# Altium PCB ISL6236_DEMO_PCB.PcbDoc
Units mm, origin at the board's own origin, x right, y up, seen from the top; angles counter-clockwise.
Board outline 50 x 50 mm, 6 copper layers (L1, L2, L3, L4, L5, L6), stack 0.816 mm thick; 41 components, 27 nets, 119 pads, 96 vias.
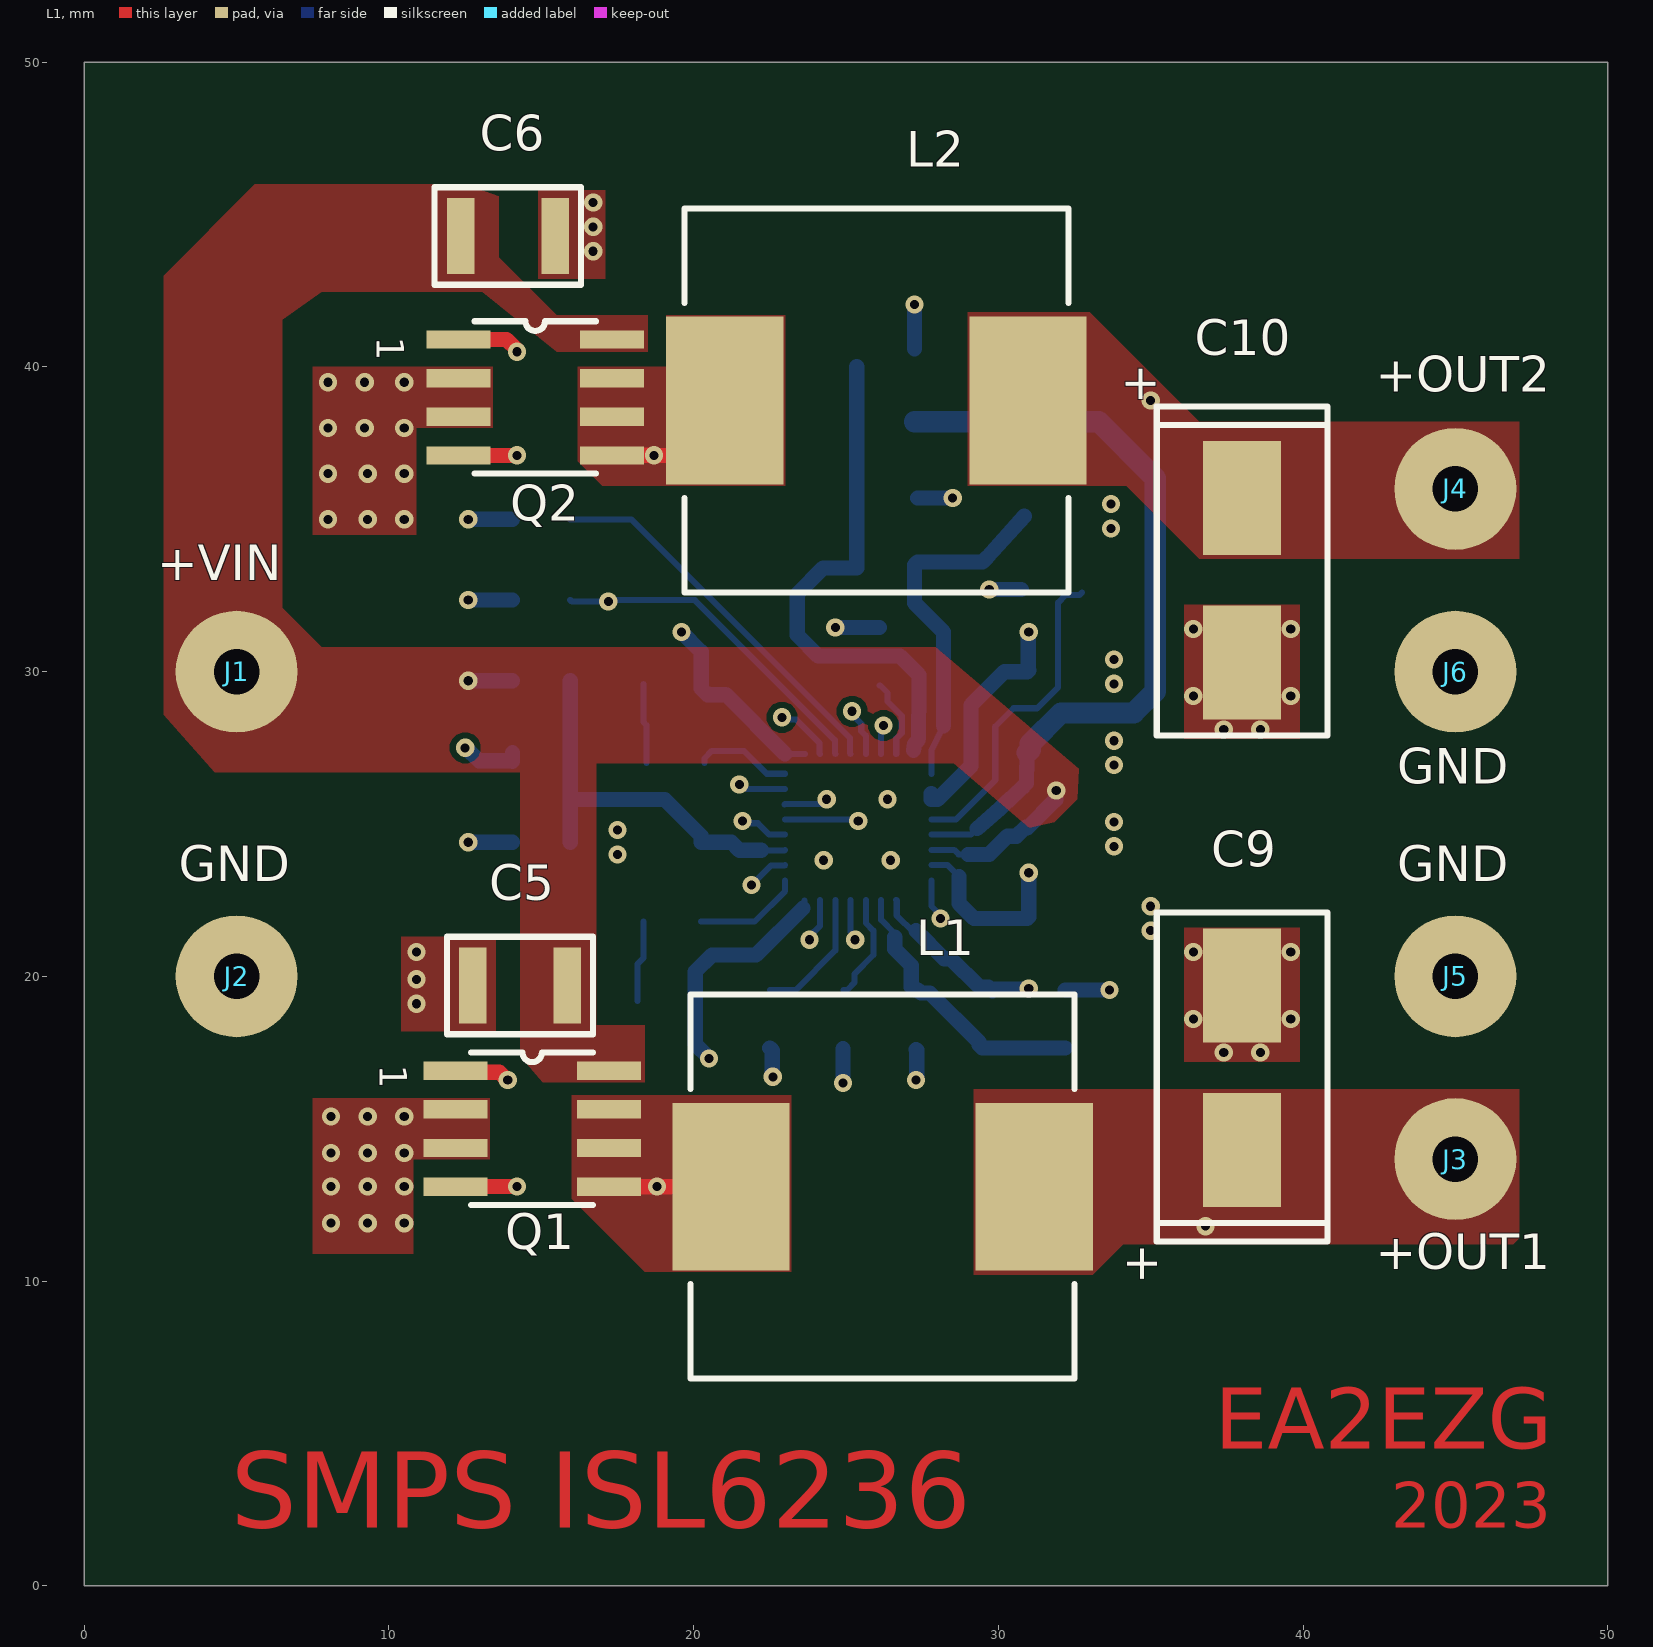
[diagram p0: L1 view]
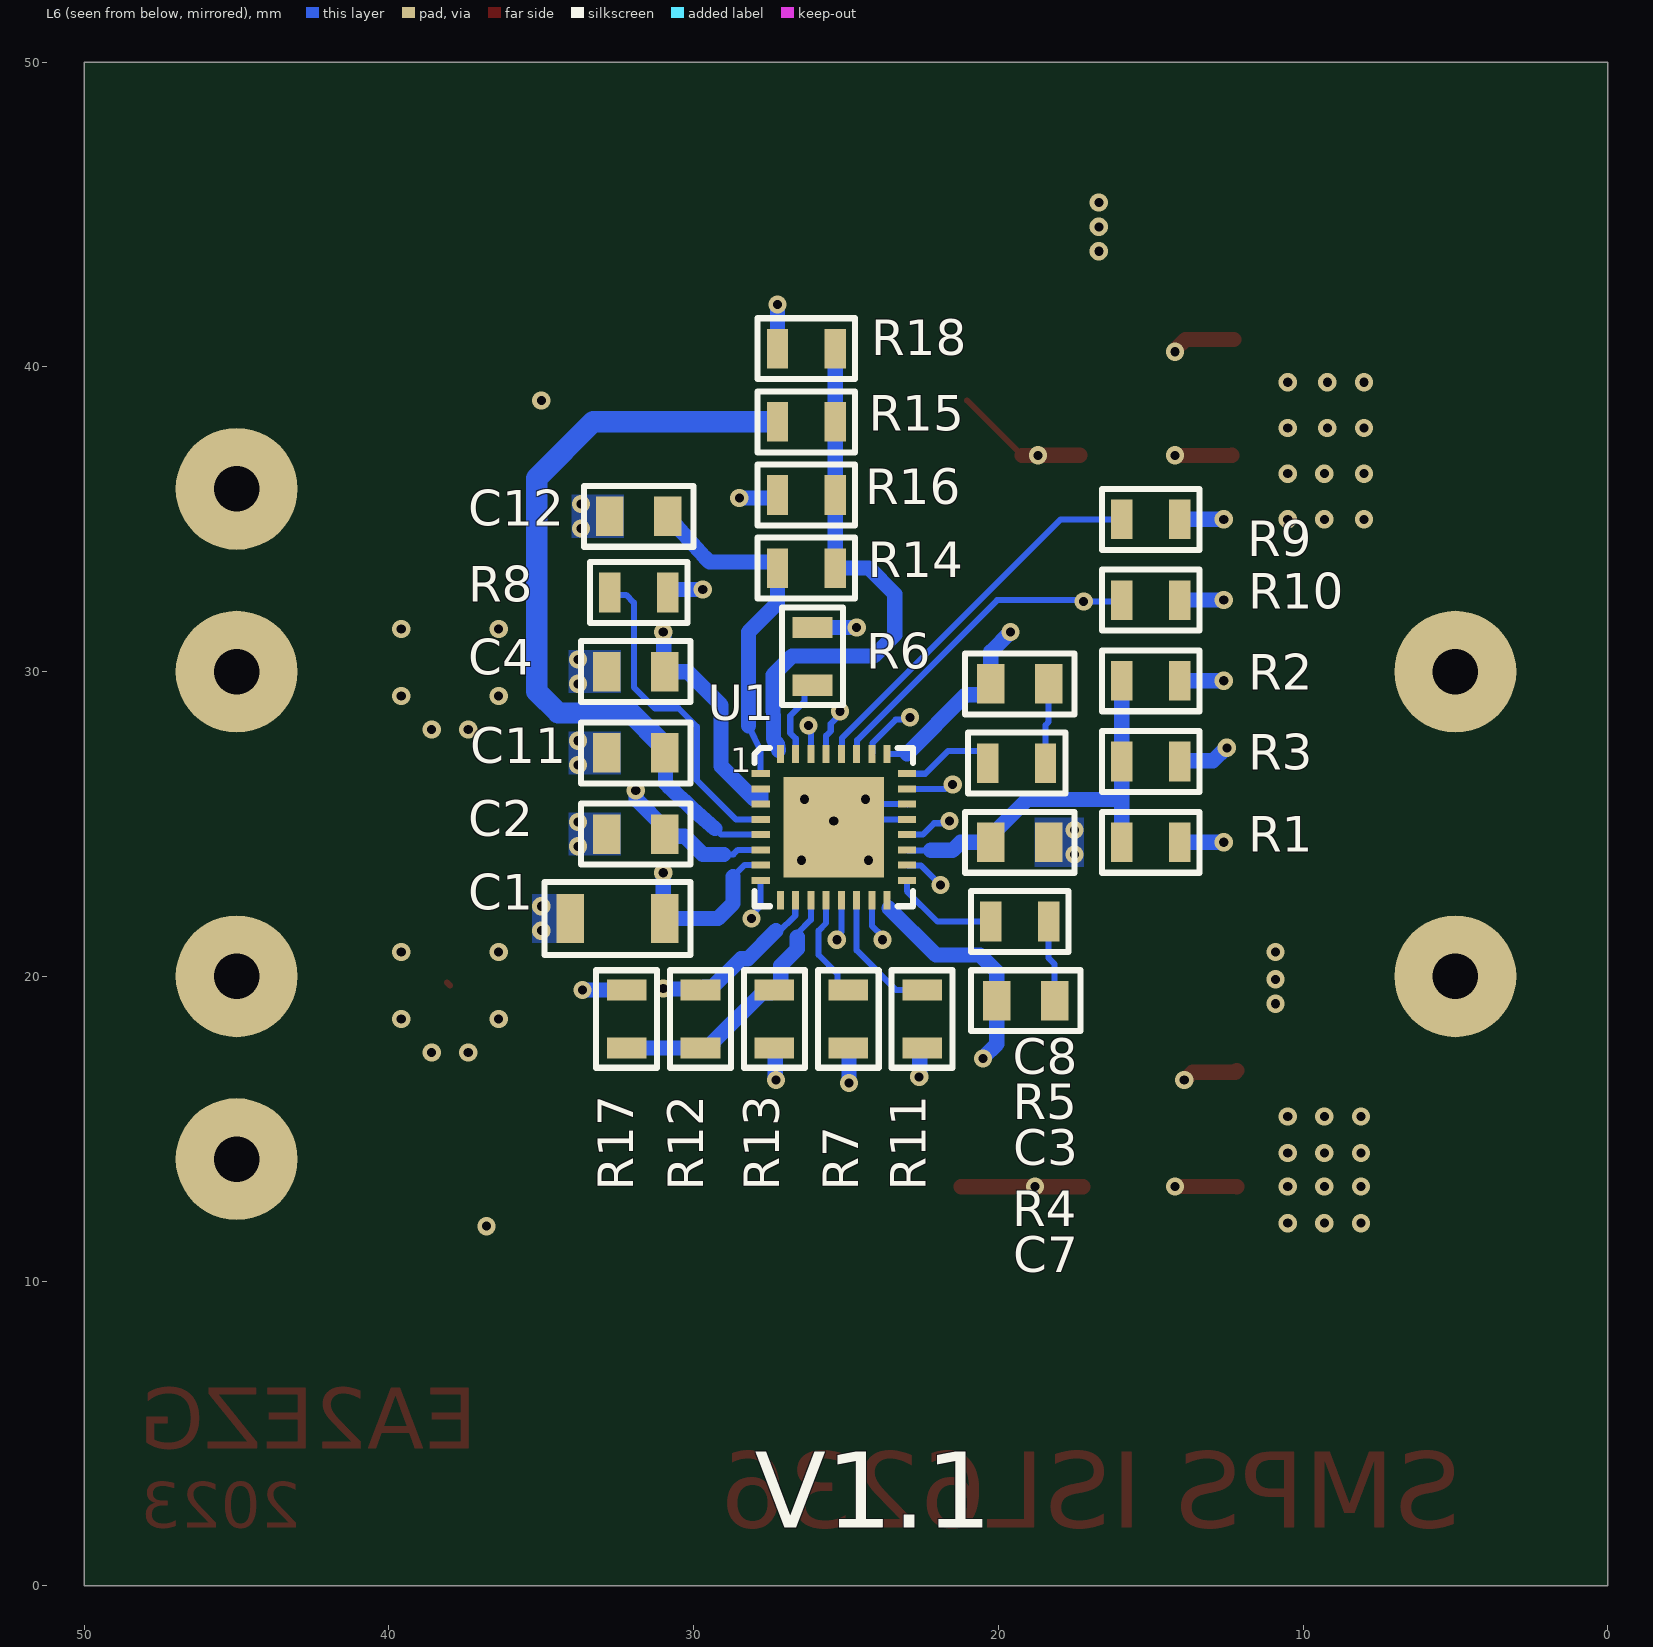
[diagram p1: L6 view, seen from below]
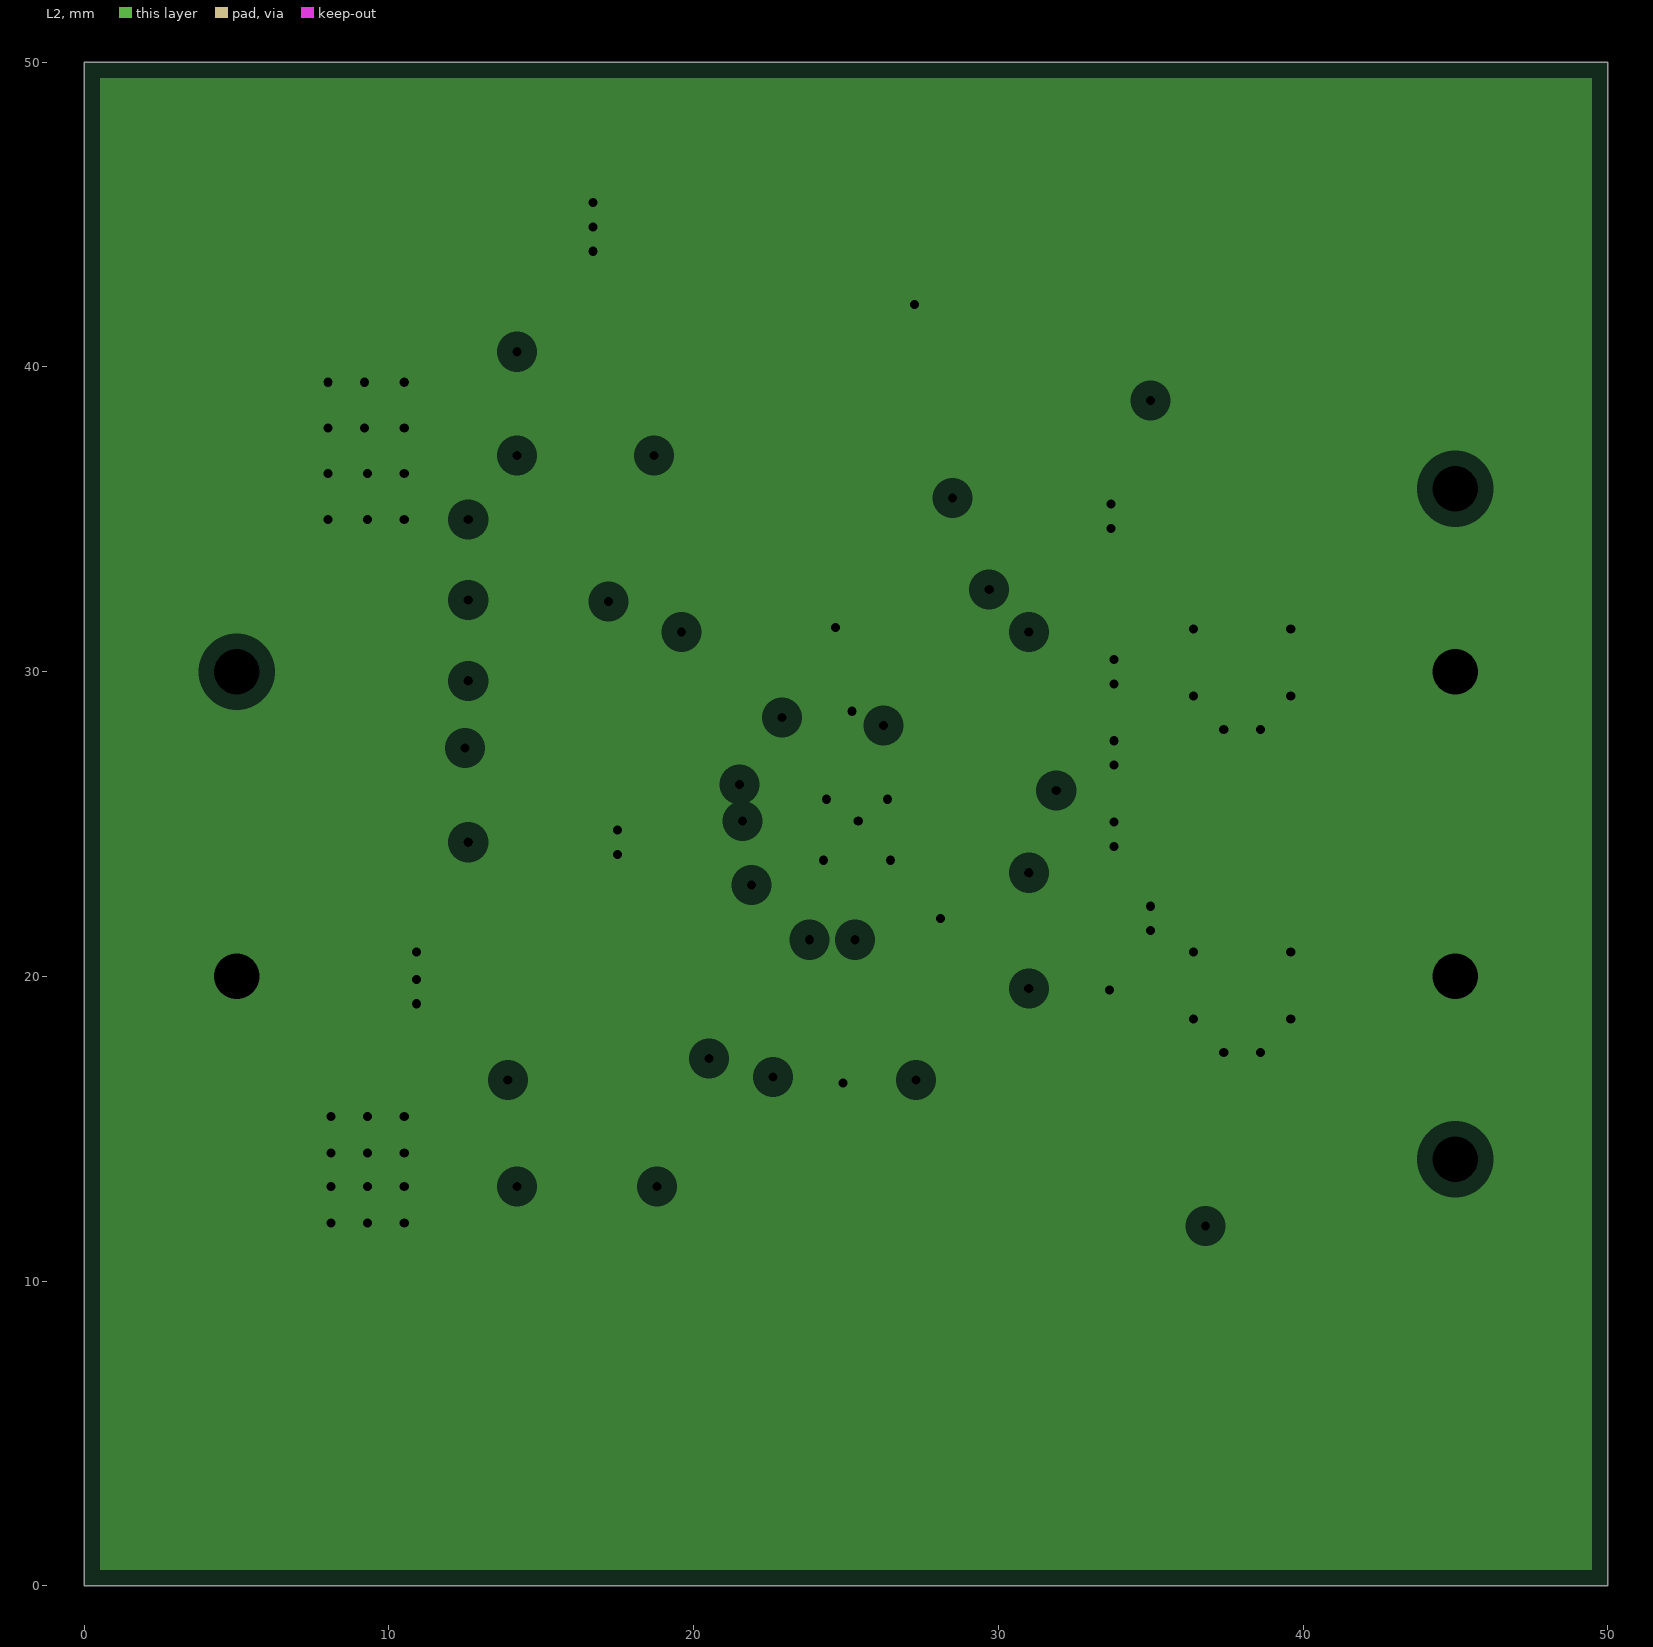
[diagram p2: L2, clearances drawn from the general rule]
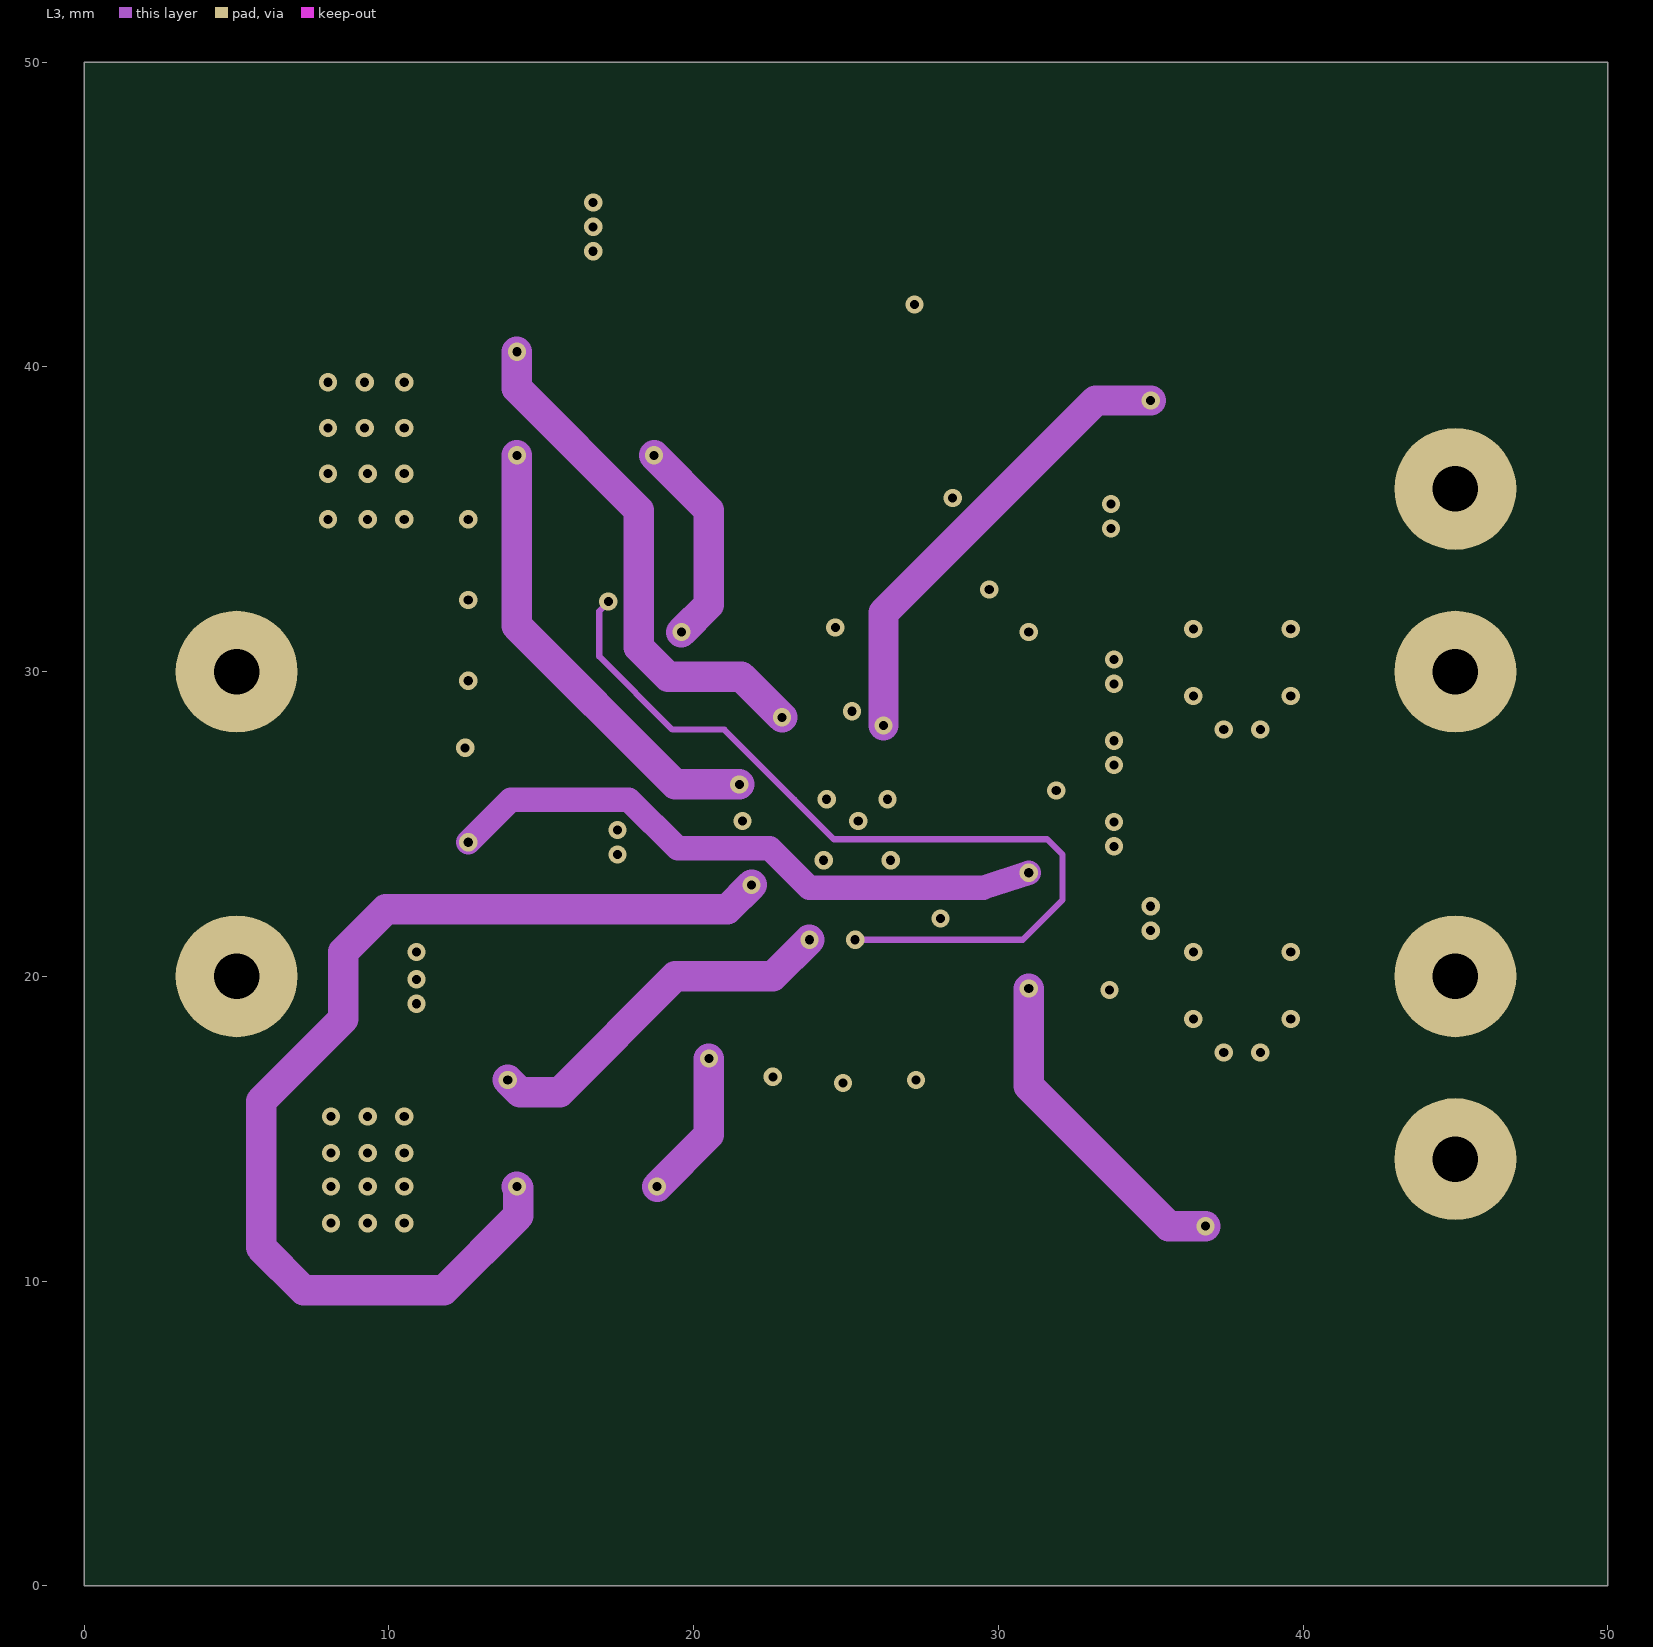
[diagram p3: L3]
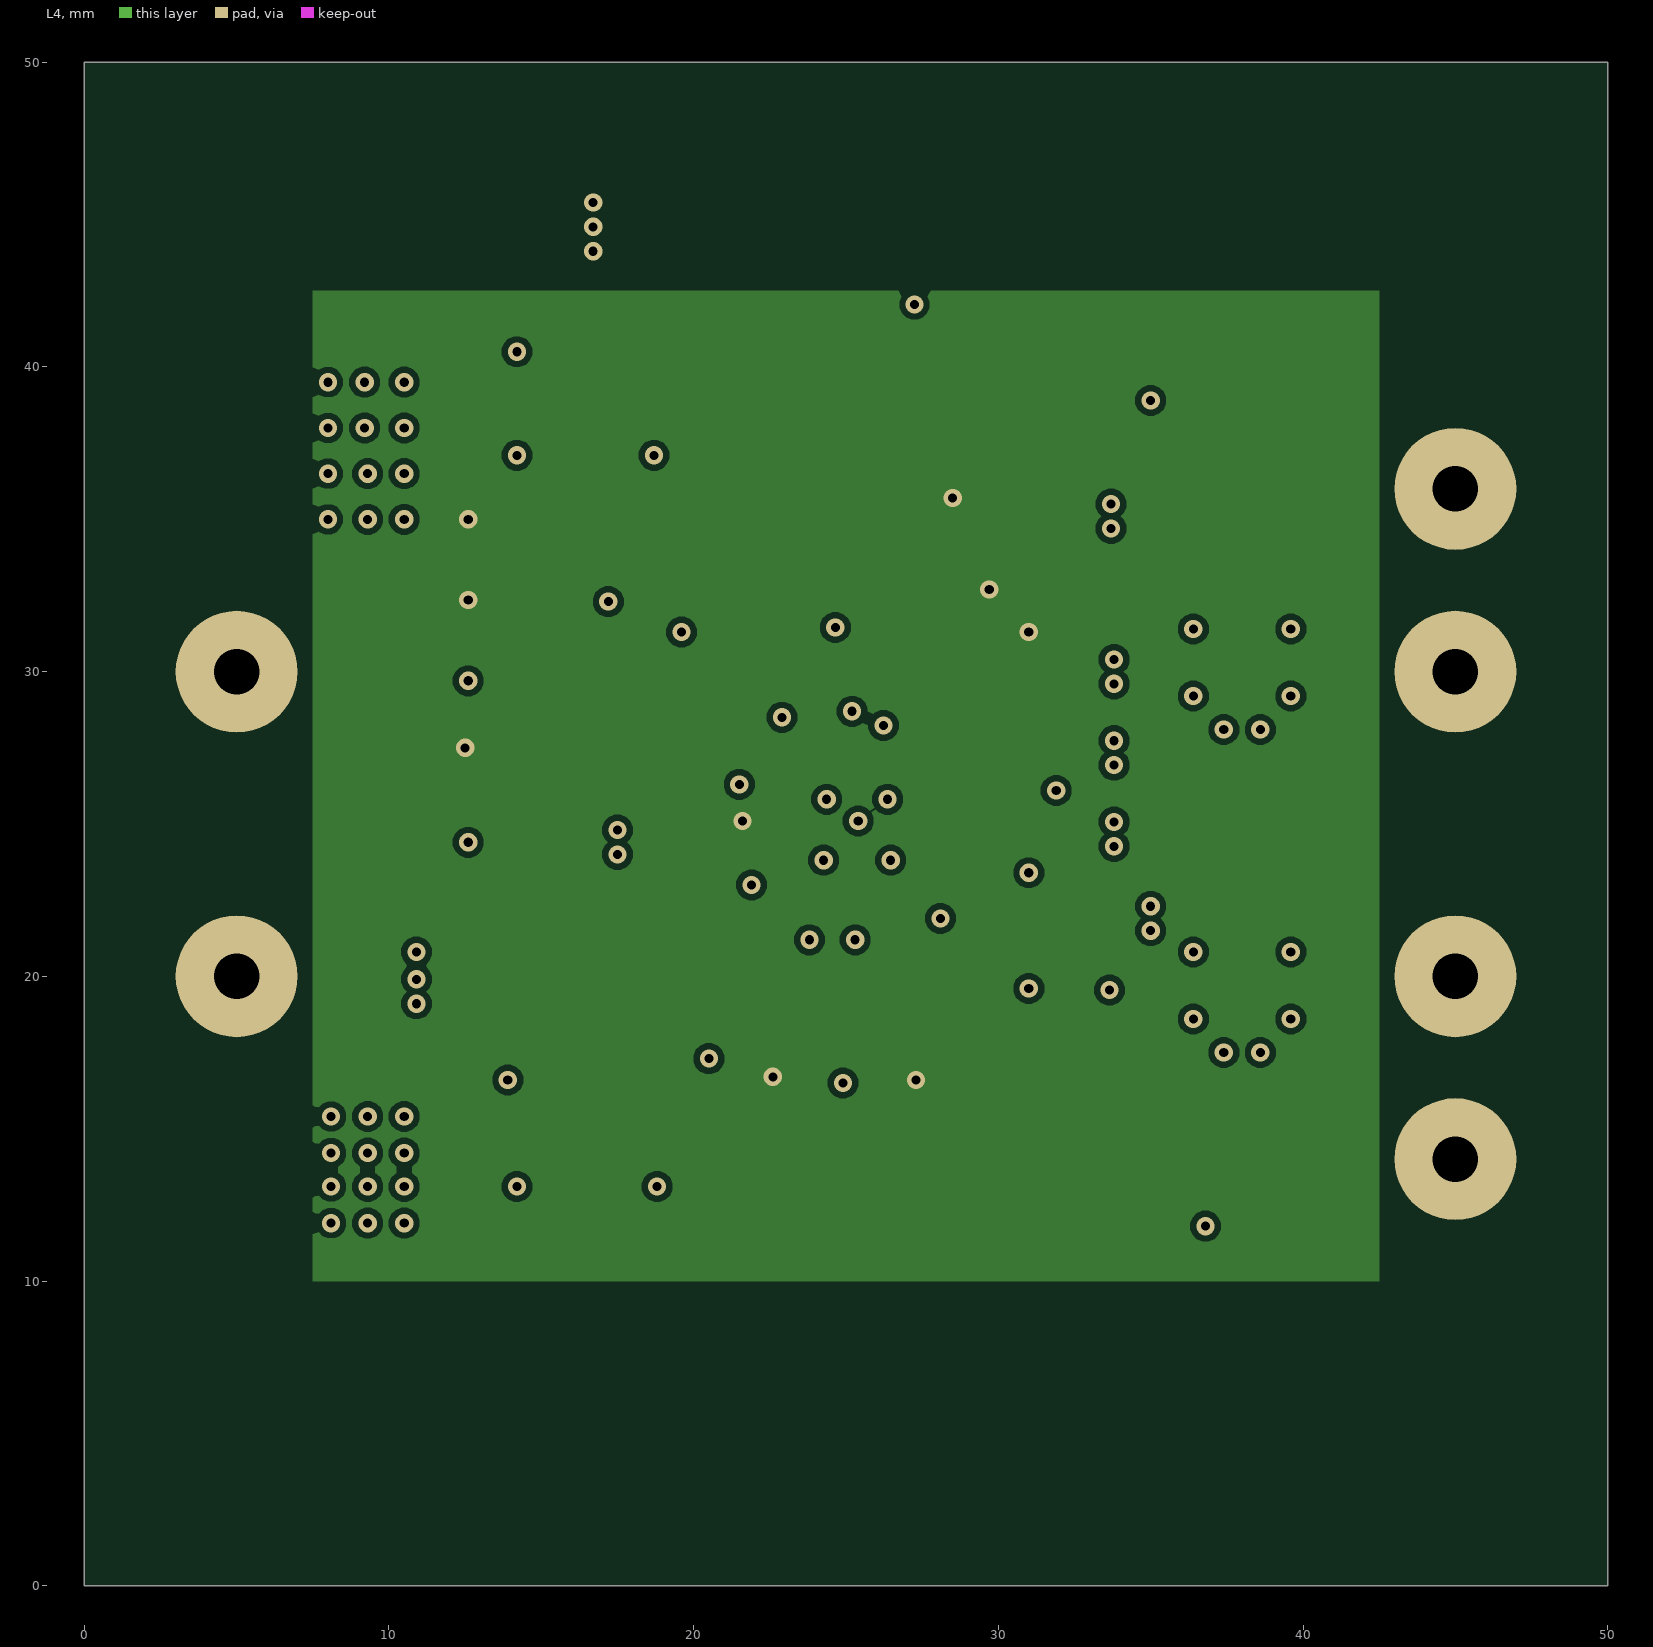
[diagram p4: L4]
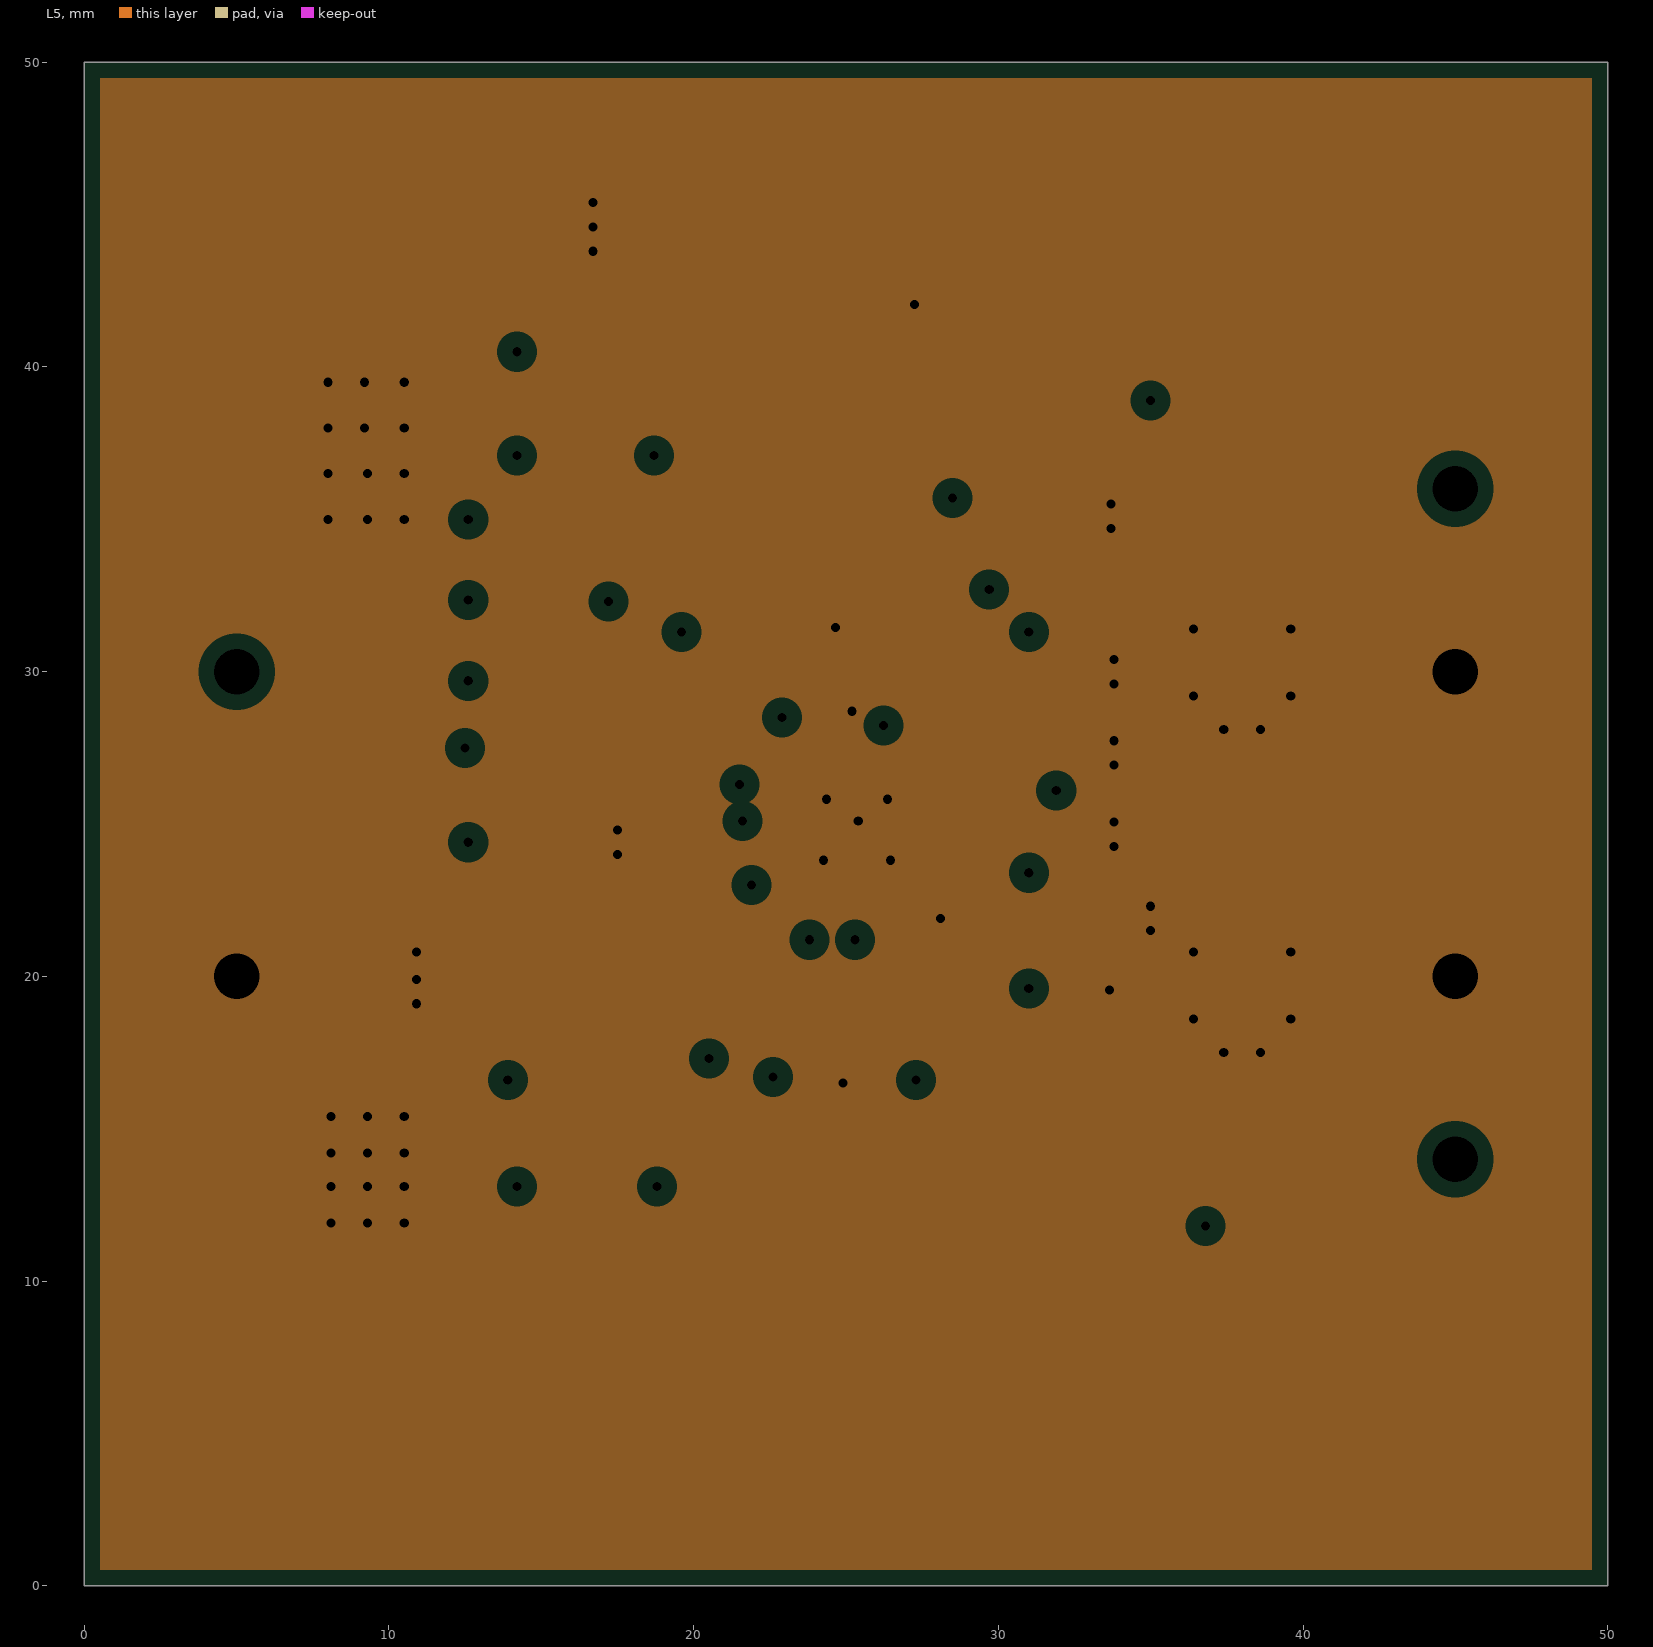
[diagram p5: L5, clearances drawn from the general rule]

## Layer stack, top to bottom
Top Solder: solder mask 0.0102, Solder Resist, Dk 3.5
L1: signal copper 0.0356
Dielectric 2: prepreg 0.0711, PP-006, Dk 4.1
L2: plane copper 0.035, net GND
Dielectric 3: prepreg 0.0711, PP-006, Dk 4.1
L3: signal copper 0.035
Dielectric 4: prepreg 0.0711, PP-006, Dk 4.1
L4: signal copper 0.035
Dielectric 5: prepreg 0.0711, PP-006, Dk 4.1
L5: plane copper 0.035, net GND
Dielectric 1: dielectric 0.32, FR-4, Dk 4.8
L6: signal copper 0.0356
Bottom Solder: solder mask 0.0102, Solder Resist, Dk 3.5

## Board outline
0,0 50,0 50,50 0,50

## Design rules (kind name [scope] priority, off if disabled: settings)
Clearance [All] p1: gap=0.2 ignorepadtopadclearanceinfootprint=FALSE
ComponentClearance [All] p1: gap=0.1 collisioncheckmode=3 verticalgap=0.1 showdistances=FALSE
HoleSize [IsVia] p1: absolutevalues=TRUE maxlimit=0.3 minlimit=0.3 maxpercent=80.000 minpercent=20.000
MinimumSolderMaskSliver [All] p1: minsoldermaskwidth=0.1
PlaneClearance [All] p1: clearance=0.508
PlaneConnect [All] p1: pad.planeconnectstyle=Relief pad.reliefexpansion=0.508 pad.reliefentries=4 pad.reliefconductorwidth=1 pad.reliefairgap=0.5 via.planeconnectstyle=Direct via.reliefexpansion=0.508 via.reliefentries=4 via.reliefconductorwidth=0.254 via.reliefairgap=0.254
PolygonConnect [All] p1: connectstyle=Direct reliefconductorwidth=0.254 reliefentries=4 polygonreliefangle="90 Angle" airgapwidth=0.254
RoutingVias [All] p1: holewidth=0.3 width=0.6 viastyle="Through Hole" minholewidth=0.3 minwidth=0.6 maxholewidth=0.3 maxwidth=0.6
SilkToSilkClearance [All] p1: silktosilkclearance=0.2
SilkToSolderMaskClearance [IsPad] p1: minsilkscreentomaskgap=0.1 clearancetoexposedcopper=TRUE
SolderMaskExpansion [All] p1: expansion=0.102 istentingtop=FALSE
Width [All] p1: maxlimit=10 minlimit=0.2 preferedwidth=0.2
23 further rules are at their usual default settings.

## Components (designator, comment, footprint, x,y, rotation, side; value= is the part's Value field where it differs from the comment)
C1 "4u7, 50V" C1206 32.5,21.9 r180 bottom
C2 "1uF_50V" C0805 31.9,24.667 r180 bottom
C3 "1uF_50V" C0805 19.3,24.4 r0 bottom
C4 "1uF_50V" C0805 31.9,30 r180 bottom
C5 "10uF" C1210 14.3,19.7 r0 top
C6 "10uF" C1210 13.9,44.3 r180 top
C7 "100nF" C0805 19.1,19.2 r180 bottom
C8 "220nF" C0805 19.3,29.6 r0 bottom
C9 "330uF 10V" 7343-43 38,17 r90 top
C10 "330uF 10V" 7343-43 38,33 r270 top
C11 "10nF" C0805 31.9,27.333 r180 bottom
C12 "100nF" C0805 31.8,35.1 r0 bottom
J1 "4mmx1mm5" PAD_WITH_HOLE_4MMX1MM5 5,30 r90 top
J2 "4mmx1mm5" PAD_WITH_HOLE_4MMX1MM5 5,20 r90 top
J3 "4mmx1mm5" PAD_WITH_HOLE_4MMX1MM5 45,14 r0 top
J4 "4mmx1mm5" PAD_WITH_HOLE_4MMX1MM5 45,36 r0 top
J5 "4mmx1mm5" PAD_WITH_HOLE_4MMX1MM5 45,20 r0 top
J6 "4mmx1mm5" PAD_WITH_HOLE_4MMX1MM5 45,30 r0 top
L1 "3u3.DR125-3R3-R" DR125 26.2,13.1 r180 top
L2 "2u2. DR125-2R2-R" DR125 26,38.9 r0 top
Q1 "SI4816BDY-T1-E3" SO-8 14.7,15 r0 top
Q2 "SI4816BDY-T1-E3" SO-8 14.8,39 r0 top
R1 "0R" R0805 15,24.4 r180 bottom
R2 "0R" R0805 15,29.7 r0 bottom
R3 "10R" R0805 15,27.05 r180 bottom
R4 "1R" R0805 19.3,21.8 r0 bottom
R5 "1R" R0805 19.4,27 r180 bottom
R6 "200K" R0805 26.1,30.5 r90 bottom
R7 "200K" R0805 24.925,18.6 r90 bottom
R8 "10K" R0805 31.8,32.6 r180 bottom
R9 "200K" R0805 15,35 r180 bottom
R10 "200K" R0805 15,32.35 r180 bottom
R11 "10K" R0805 22.5,18.6 r270 bottom
R12 "DNF" R0805 29.775,18.6 r90 bottom
R13 "0R" R0805 27.35,18.6 r270 bottom
R14 "DNF" R0805 26.3,33.4 r0 bottom
R15 "0R" R0805 26.3,38.2 r0 bottom
R16 "DNF" R0805 26.3,35.8 r0 bottom
R17 "DNF" R0805 32.2,18.6 r270 bottom
R18 "DNF" R0805 26.3,40.6 r180 bottom
U1 "ISL6236AIRZ" L32.5X5B 25.4,24.9 r180 bottom

## Footprints (in the part's own frame and the unit in brackets; to place one, negate y for a bottom-side part, rotate by r counter-clockwise, add the part's x,y. Pads: shape width x height; smd on the part's side, far side on the other; paste and mask are expansions set on the pad)
7343-43 [mm]
  rect 3.75x2.55 smd: 1(-2.7,0) 2(2.7,0)
  silkscreen extent -5.7,-2.8 5.1,2.8
C0805 [mm]
  rect 0.9x1.3 smd: 1(-0.95,0) 2(0.95,0)
  silkscreen extent -1.8,-1 1.8,1
C1206 [mm]
  rect 0.9x1.6 smd: 1(-1.55,0) 2(1.55,0)
  silkscreen extent -2.4,-1.2 2.4,1.2
C1210 [mm]
  rect 0.9x2.5 smd: 1(-1.55,0) 2(1.55,0)
  silkscreen extent -2.4,-1.6 2.4,1.6
DR125 [mm]
  rect 3.85x5.5 smd: 1(-4.975,0) 2(4.975,0)
  silkscreen extent -6.3,-6.3 6.3,6.3
L32.5X5B [mm]
  rect 0.6x0.23 smd mask+0.051: 1(-2.4,1.75) 2(-2.4,1.25) 3(-2.4,0.75) 4(-2.4,0.25) 5(-2.4,-0.25) 6(-2.4,-0.75) 7(-2.4,-1.25) 8(-2.4,-1.75) 17(2.4,-1.75) 18(2.4,-1.25) 19(2.4,-0.75) 20(2.4,-0.25) 21(2.4,0.25) 22(2.4,0.75) 23(2.4,1.25) 24(2.4,1.75)
  rect 0.23x0.6 smd mask+0.051: 9(-1.75,-2.4) 10(-1.25,-2.4) 11(-0.75,-2.4) 12(-0.25,-2.4) 13(0.25,-2.4) 14(0.75,-2.4) 15(1.25,-2.4) 16(1.75,-2.4) 25(1.75,2.4) 26(1.25,2.4) 27(0.75,2.4) 28(0.25,2.4) 29(-0.25,2.4) 30(-0.75,2.4) 31(-1.25,2.4) 32(-1.75,2.4)
  rect 3.3x3.3 smd mask+0.051: 33(0,0)
  silkscreen extent -2.6,-2.6 2.6,2.6
PAD_WITH_HOLE_4MMX1MM5 [mm]
  round 4 hole 1.5: 1(0,0)
R0805 [mm]
  rect 0.7x1.3 smd: 1(-0.95,0) 2(0.95,0)
  silkscreen extent -1.6,-1 1.6,1
SO-8 [mm]
  rect 2.1x0.6 smd: 1(-2.525,1.905) 2(-2.525,0.635) 3(-2.525,-0.635) 4(-2.525,-1.905) 5(2.525,-1.905) 6(2.525,-0.635) 7(2.525,0.635) 8(2.525,1.905)
  silkscreen extent -2,-2.5 2,2.5

## Part data
C1: library part C3216X5R1H475K160AB, "C Series 1206 4.7 uF 50 V ±10 % Tolerance X5R SMT Multilayer Ceramic Capacitor", Manufacturer=TDK, Supplier Part Number 1=445-5994-1-ND, Category="Ceramic Capacitors", ComponentLink1Description=https://datasheet.ciiva.com/24216/c3216x5r1h475k160ab-265269-24216325.pdf?src-supplier=Mouser, ComponentLink1URL=https://datasheet.ciiva.com/24216/c3216x5r1h475k160ab-265269-24216325.pdf?src-supplier=Mouser, ComponentLink2Description=https://datasheet.ciiva.com/6286/tdkmlcccaprange-6286230.pdf?src-supplier=Digi-Key, ComponentLink2URL=https://datasheet.ciiva.com/6286/tdkmlcccaprange-6286230.pdf?src-supplier=Digi-Key, ComponentLink3Description=https://datasheet.ciiva.com/6286/tdkmlcccaprange-6286233.pdf?src-supplier=Digi-Key, ComponentLink3URL=https://datasheet.ciiva.com/6286/tdkmlcccaprange-6286233.pdf?src-supplier=Digi-Key, ComponentLink4Description=https://datasheet.ciiva.com/6286/tdkmlcccaprange-6286236.pdf?src-supplier=Digi-Key, ComponentLink4URL=https://datasheet.ciiva.com/6286/tdkmlcccaprange-6286236.pdf?src-supplier=Digi-Key, Manufacturer Part Number=C3216X5R1H475K160AB, Pricing 1="1=0,72, 10=0,53, 50=0,4242, 100=0,3636, 500=0,28784, 1000=0,2424 (USD)", RoHS=Yes, Stock 1=67002, Supplier 1=Digi-Key
C2 C3 C4: library part C2012X7R1H105K125AB, "C Series 0805 1 uF 50 V ±10% Tolerance X7R SMT Multilayer Ceramic Capacitor", Manufacturer=TDK, Supplier Part Number 1=445-7547-1-ND, Category="Ceramic Capacitors", ComponentLink1Description=https://datasheet.ciiva.com/6274/tdkmlcccaprange-6274886.pdf?src-supplier=Digi-Key, ComponentLink1URL=https://datasheet.ciiva.com/6274/tdkmlcccaprange-6274886.pdf?src-supplier=Digi-Key, ComponentLink2Description=https://datasheet.ciiva.com/6274/tdkmlcccaprange-6274888.pdf?src-supplier=Digi-Key, ComponentLink2URL=https://datasheet.ciiva.com/6274/tdkmlcccaprange-6274888.pdf?src-supplier=Digi-Key, ComponentLink3Description=https://datasheet.ciiva.com/6274/tdkmlcccaprange-6274890.pdf?src-supplier=Digi-Key, ComponentLink3URL=https://datasheet.ciiva.com/6274/tdkmlcccaprange-6274890.pdf?src-supplier=Digi-Key, ComponentLink4Description=https://datasheet.ciiva.com/24191/general-b11-24191449.pdf?src-supplier=Future+Electronics, ComponentLink4URL=https://datasheet.ciiva.com/24191/general-b11-24191449.pdf?src-supplier=Future+Electronics, ComponentLink5Description=https://datasheet.ciiva.com/28673/mlcc-commercial-general-en-28673565.pdf?src-supplier=Element14, ComponentLink5URL=https://datasheet.ciiva.com/28673/mlcc-commercial-general-en-28673565.pdf?src-supplier=Element14, ComponentLink6Description=https://datasheet.ciiva.com/22718/1796654-22718037.pdf?src-supplier=Element14, ComponentLink6URL=https://datasheet.ciiva.com/22718/1796654-22718037.pdf?src-supplier=Element14, ComponentLink7Description=https://datasheet.ciiva.com/23803/1796654-23803036.pdf?src-supplier=Newark, ComponentLink7URL=https://datasheet.ciiva.com/23803/1796654-23803036.pdf?src-supplier=Newark, Manufacturer Part Number=C2012X7R1H105K125AB, Pricing 1="1=0,28, 10=0,189, 50=0,126, 100=0,1071, 500=0,07562, 1000=0,06618 (USD)", RoHS=Yes, Stock 1=331733, Supplier 1=Digi-Key
C5 C6: library part C1210C106K5PACTU, "Multilayer Ceramic Capacitor, 10 uF, 50 V, ± 10%, X5R, 1210 [3225 Metric]", Manufacturer=KEMET, Supplier Part Number 1=399-C1210C106K5PAC7800CT-ND, Category="Ceramic Capacitors", ComponentLink1Description=https://datasheet.ciiva.com/29540/kem-c1006-x5r-smd-29540231.pdf?src-supplier=Digi-Key, ComponentLink1URL=https://datasheet.ciiva.com/29540/kem-c1006-x5r-smd-29540231.pdf?src-supplier=Digi-Key, ComponentLink2Description=https://datasheet.ciiva.com/29540/kem-c1006-x5r-smd-29540232.pdf?src-supplier=Digi-Key, ComponentLink2URL=https://datasheet.ciiva.com/29540/kem-c1006-x5r-smd-29540232.pdf?src-supplier=Digi-Key, ComponentLink3Description=https://datasheet.ciiva.com/29540/kem-c1006-x5r-smd-29540233.pdf?src-supplier=Digi-Key, ComponentLink3URL=https://datasheet.ciiva.com/29540/kem-c1006-x5r-smd-29540233.pdf?src-supplier=Digi-Key, Manufacturer Part Number=C1210C106K5PACTU, Pricing 1="1=0,95, 10=0,722, 50=0,6, 100=0,5166, 500=0,39996 (USD)", RoHS=Yes, Stock 1=93202, Supplier 1=Digi-Key
C7 C12: library part C0805C104K5REC7210, "Cap Cer 0805 0.1UF 50V X7R 10%", Manufacturer=KEMET, Supplier Part Number 1=399-C0805C104K5REC7210CT-ND, Category="Ceramic Capacitors", ComponentLink1Description=https://api.kemet.com/component-edge/download/datasheet/C0805C104K5REC7210.pdf?src-supplier=Digi-Key, ComponentLink1URL=https://api.kemet.com/component-edge/download/datasheet/C0805C104K5REC7210.pdf?src-supplier=Digi-Key, Manufacturer Part Number=C0805C104K5REC7210, Pricing 1="1=0,26, 10=0,176, 50=0,1054, 100=0,089, 500=0,06092, 1000=0,05389, 2500=0,05155, 5000=0,04686 (USD)", RoHS=Yes, RoHS Compliant=Yes, Stock 1=14120, Supplier 1=Digi-Key
C8: library part C0805F224K5RACTU, "Cap Ceramic 0.22uF 50V X7R 10% SMD 2.0 x 1.2 mm OMD-CAP 125 C Plastic T/R", Manufacturer=KEMET, Supplier Part Number 1=399-C0805F224K5RAC7800CT-ND, Category="Ceramic Capacitors", ComponentLink1Description=https://datasheet.ciiva.com/147/docfinderpartnumber-c0805f224k5ractu-147508.pdf?src-supplier=Digi-Key, ComponentLink1URL=https://datasheet.ciiva.com/147/docfinderpartnumber-c0805f224k5ractu-147508.pdf?src-supplier=Digi-Key, ComponentLink2Description=https://datasheet.ciiva.com/5969/kem-c1002-x7r-smd-5969831.pdf?src-supplier=Farnell, ComponentLink2URL=https://datasheet.ciiva.com/5969/kem-c1002-x7r-smd-5969831.pdf?src-supplier=Farnell, ComponentLink3Description=https://datasheet.ciiva.com/7842/kem-c1002-x7r-smd-7842633.pdf?src-supplier=Element14, ComponentLink3URL=https://datasheet.ciiva.com/7842/kem-c1002-x7r-smd-7842633.pdf?src-supplier=Element14, Manufacturer Part Number=C0805F224K5RACTU, Pricing 1="1=0,45, 10=0,319, 50=0,241, 100=0,21, 500=0,15554, 1000=0,13221 (USD)", RoHS=Yes, Stock 1=27532, Supplier 1=Digi-Key
C9 C10: library part T530X337M010ATE004, "Cap Tant Solid 330uF 10V X CASE 20% (7.3 X 4.3 X 4mm) SMD 7343-43 0.004 Ohm 125 C T/R", Manufacturer=KEMET, Supplier Part Number 1=399-10378-1-ND, Category="Polymer Capacitors", ComponentLink1Description=https://datasheet.ciiva.com/11794/0900766b80deaa91-11794477.pdf?src-supplier=Rs, ComponentLink1URL=https://datasheet.ciiva.com/11794/0900766b80deaa91-11794477.pdf?src-supplier=Rs, ComponentLink2Description=https://datasheet.ciiva.com/14593/70096008-14593753.pdf?src-supplier=Allied+Electronics, ComponentLink2URL=https://datasheet.ciiva.com/14593/70096008-14593753.pdf?src-supplier=Allied+Electronics, Manufacturer Part Number=T530X337M010ATE004, Pricing 1="1=7,14, 10=6,35, 50=5,5562, 100=5,0799 (USD)", RoHS=Yes, Stock 1=1921, Supplier 1=Digi-Key
C11: library part C0805F103K5RACTU, "0805 C 10nF Ceramic Multilayer Capacitor; 50 VDC; +125degC; X7R Dielec; +/-10%", Manufacturer=KEMET, Supplier Part Number 1=399-C0805F103K5RAC7800CT-ND, Category="Ceramic Capacitors", ComponentLink1Description=https://datasheet.ciiva.com/146/docfinderpartnumber-c0805f103k5ractu-146278.pdf?src-supplier=Digi-Key, ComponentLink1URL=https://datasheet.ciiva.com/146/docfinderpartnumber-c0805f103k5ractu-146278.pdf?src-supplier=Digi-Key, ComponentLink2Description=https://datasheet.ciiva.com/7842/48829-7842407.pdf?src-supplier=Element14, ComponentLink2URL=https://datasheet.ciiva.com/7842/48829-7842407.pdf?src-supplier=Element14, ComponentLink3Description=https://datasheet.ciiva.com/7842/48829-7842408.pdf?src-supplier=Element14, ComponentLink3URL=https://datasheet.ciiva.com/7842/48829-7842408.pdf?src-supplier=Element14, Manufacturer Part Number=C0805F103K5RACTU, Pricing 1="1=0,35, 10=0,237, 50=0,158, 100=0,1343, 500=0,09478, 1000=0,08293 (USD)", RoHS=Yes, Stock 1=11337, Supplier 1=Digi-Key
J1 J2 J3 J4 J5 J6: library part PAD_WITH_HOLE_4mmx1mm5, "Pad with a hole 4mmx1mm5"
L1: library part DR125-3R3-R, "Inductor Power Shielded Drum Core 3.3uH 20% 100KHz Ferrite 9.26A 6.3mOhm DCR T/R", Manufacturer="Eaton Cooper", Supplier Part Number 1=513-1529-1-ND, Category="Fixed Inductors", ComponentLink1Description=https://datasheet.ciiva.com/26858/getdatasheetpartid-251124-26858392.pdf?src-supplier=Verical, ComponentLink1URL=https://datasheet.ciiva.com/26858/getdatasheetpartid-251124-26858392.pdf?src-supplier=Verical, ComponentLink2Description=https://datasheet.ciiva.com/16295/bus-elx-ds-4315-dr-series-16295562.pdf?src-supplier=Future+Electronics, ComponentLink2URL=https://datasheet.ciiva.com/16295/bus-elx-ds-4315-dr-series-16295562.pdf?src-supplier=Future+Electronics, ComponentLink3Description=https://datasheet.ciiva.com/30081/4a32919a-7470-4ae0-be45-b59e3a1351ef-30081146.pdf?src-supplier=Onlinecomponents.com, ComponentLink3URL=https://datasheet.ciiva.com/30081/4a32919a-7470-4ae0-be45-b59e3a1351ef-30081146.pdf?src-supplier=Onlinecomponents.com, ComponentLink4Description=https://datasheet.ciiva.com/5707/87246-5707962.pdf?src-supplier=Farnell, ComponentLink4URL=https://datasheet.ciiva.com/5707/87246-5707962.pdf?src-supplier=Farnell, Manufacturer Part Number=DR125-3R3-R, Pricing 1="1=1,24, 10=1,149, 25=1,0604, 50=0,8836, 100=0,8307, 250=0,74228 (USD)", RoHS=Yes, Stock 1=28814, Supplier 1=Digi-Key
L2: library part DR125-2R2-R, "Ind Power Shielded Wirewound 2.2uH 20% 100KHz Ferrite 10.9A T/R", Manufacturer="Eaton Cooper", Supplier Part Number 1=513-1662-1-ND, Category="Fixed Inductors", ComponentLink1Description=https://datasheet.ciiva.com/14667/0900766b8116a153-14667792.pdf?src-supplier=Rs, ComponentLink1URL=https://datasheet.ciiva.com/14667/0900766b8116a153-14667792.pdf?src-supplier=Rs, ComponentLink2Description=https://datasheet.ciiva.com/26926/getdatasheetpartid-571249-26926912.pdf?src-supplier=Verical, ComponentLink2URL=https://datasheet.ciiva.com/26926/getdatasheetpartid-571249-26926912.pdf?src-supplier=Verical, ComponentLink3Description=https://datasheet.ciiva.com/8004/87246-8004874.pdf?src-supplier=Element14, ComponentLink3URL=https://datasheet.ciiva.com/8004/87246-8004874.pdf?src-supplier=Element14, Manufacturer Part Number=DR125-2R2-R, Pricing 1="1=1,24, 10=1,149, 25=1,0604, 50=0,8838, 100=0,8307, 250=0,74236 (USD)", RoHS=Yes, Stock 1=2367, Supplier 1=Digi-Key
Q1 Q2: "Trans Mosfet N-ch 30V 5.8A/8.2A 8-PIN SOIC N T/r", Manufacturer="Vishay Siliconix", Supplier Part Number 1=SI4816BDY-T1-E3DKR-ND, Category=MOSFETs, ComponentLink1Description=https://datasheet.ciiva.com/15137/getdatasheetpartid-99188-15137841.pdf?src-supplier=Verical, ComponentLink1URL=https://datasheet.ciiva.com/15137/getdatasheetpartid-99188-15137841.pdf?src-supplier=Verical, ComponentLink2Description=https://datasheet.ciiva.com/7710/si4816bd-7710449.pdf?src-supplier=Element14, ComponentLink2URL=https://datasheet.ciiva.com/7710/si4816bd-7710449.pdf?src-supplier=Element14, ComponentLink3Description=https://datasheet.ciiva.com/928/si4816bd-928458.pdf?src-supplier=Digi-Key, ComponentLink3URL=https://datasheet.ciiva.com/928/si4816bd-928458.pdf?src-supplier=Digi-Key, ComponentLink4Description=https://datasheet.ciiva.com/928/si4816bd-928459.pdf?src-supplier=Digi-Key, ComponentLink4URL=https://datasheet.ciiva.com/928/si4816bd-928459.pdf?src-supplier=Digi-Key, ComponentLink5Description=https://datasheet.ciiva.com/928/si4816bd-928460.pdf?src-supplier=Digi-Key, ComponentLink5URL=https://datasheet.ciiva.com/928/si4816bd-928460.pdf?src-supplier=Digi-Key, ComponentLink6Description=https://datasheet.ciiva.com/11161/si4816bd-11161496.pdf?src-supplier=Avnet, ComponentLink6URL=https://datasheet.ciiva.com/11161/si4816bd-11161496.pdf?src-supplier=Avnet, ComponentLink7Description=https://datasheet.ciiva.com/16486/si4816bd-16486349.pdf?src-supplier=Future+Electronics, ComponentLink7URL=https://datasheet.ciiva.com/16486/si4816bd-16486349.pdf?src-supplier=Future+Electronics, ComponentLink8Description=https://datasheet.ciiva.com/18448/70026226-18448822.pdf?src-supplier=Allied+Electronics, ComponentLink8URL=https://datasheet.ciiva.com/18448/70026226-18448822.pdf?src-supplier=Allied+Electronics, Manufacturer Part Number=SI4816BDY-T1-E3, Pricing 1="1=1,64, 10=1,475, 100=1,1853, 500=0,97388, 1000=0,80692 (USD)", RoHS=Yes, Supplier 1=Digi-Key
R1 R2 R13 R15: library part RK73Z2ARTTD, "Res Thick Film 0805 0 Ohm Sulfur Resistant Pad SMD Automotive T/R", Case/Package=0805, Manufacturer="KOA Speer", Max Operating Temperature=155°C, Min Operating Temperature=-55°C, Supplier Part Number 1=2019-RK73Z2ARTTDCT-ND, Category="Chip SMD Resistors", ComponentLink1Description=https://datasheet.octopart.com/RK73Z2ARTTD-KOA-Speer-datasheet-149653817.pdf?src-supplier=Farnell, ComponentLink1URL=https://datasheet.octopart.com/RK73Z2ARTTD-KOA-Speer-datasheet-149653817.pdf?src-supplier=Farnell, ComponentLink2Description=https://datasheet.octopart.com/RK73Z2ARTTD-KOA-Speer-datasheet-149653814.pdf?src-supplier=Farnell, ComponentLink2URL=https://datasheet.octopart.com/RK73Z2ARTTD-KOA-Speer-datasheet-149653814.pdf?src-supplier=Farnell, Construction=Rectangular, Depth=1.25mm, Length=2mm, Manufacturer Part Number=RK73Z2ARTTD, Military Standard=Not, Pricing 1="1=0,16, 10=0,133, 50=0,0702, 100=0,0521, 500=0,03152, 1000=0,02182 (USD)", Resistance=0R, RoHS Compliant=Yes, Stock 1=238043, Supplier 1=Digi-Key
R3: library part AC0805FR-0710RL, "Res Thick Film 0805 10 Ohm 1% 0.125W(1/8W) ±200ppm/C Pad SMD Automotive T/R", Manufacturer=Yageo, Supplier Part Number 1=YAG3690CT-ND, Category="Chip SMD Resistors", ComponentLink1Description=http://www.mouser.com/ds/2/447/yageodocoutput-1111992.pdf?src-supplier=Mouser, ComponentLink1URL=http://www.mouser.com/ds/2/447/yageodocoutput-1111992.pdf?src-supplier=Mouser, ComponentLink2Description=http://www.yageo.com/NewPortal/yageodocoutput?fileName=/pdf/R-Chip/PYu-AC_51_RoHS_L_6.pdf&src-supplier=Digi-Key, ComponentLink2URL=http://www.yageo.com/NewPortal/yageodocoutput?fileName=/pdf/R-Chip/PYu-AC_51_RoHS_L_6.pdf&src-supplier=Digi-Key, ComponentLink3Description=https://www.yageo.com/upload/media/product/productsearch/datasheet/rchip/PYu-AC_51_RoHS_L_7.pdf?src-supplier=Digi-Key, ComponentLink3URL=https://www.yageo.com/upload/media/product/productsearch/datasheet/rchip/PYu-AC_51_RoHS_L_7.pdf?src-supplier=Digi-Key, Manufacturer Part Number=AC0805FR-0710RL, Pricing 1="1=0,1, 10=0,049, 50=0,032, 100=0,0272, 500=0,01914, 1000=0,01668 (USD)", RoHS=Yes, Stock 1=256849, Supplier 1=Digi-Key
R4 R5: library part AC0805FR-071RL, "Res Thick Film 0805 1 Ohm 1% 0.125W(1/8W) ±200ppm/C Pad SMD Automotive T/R", Manufacturer=Yageo, Supplier Part Number 1=YAG3705CT-ND, Category="Chip SMD Resistors", ComponentLink1Description=https://datasheet.ciiva.com/12576/pyu-ac-51-rohs-l-2-12576553.pdf?src-supplier=Mouser, ComponentLink1URL=https://datasheet.ciiva.com/12576/pyu-ac-51-rohs-l-2-12576553.pdf?src-supplier=Mouser, Manufacturer Part Number=AC0805FR-071RL, Pricing 1="1=0,1, 10=0,049, 50=0,032, 100=0,0272, 500=0,01914, 1000=0,01668 (USD)", RoHS=Yes, Stock 1=82542, Supplier 1=Digi-Key
R6 R7 R9 R10: library part AC0805FR-07200KL, "Res Thick Film 0805 200K Ohm 1% 0.125W(1/8W) ±100ppm/C Pad SMD Automotive T/R", Manufacturer=Yageo, Supplier Part Number 1=YAG3706CT-ND, Category="Chip SMD Resistors", ComponentLink1Description=http://www.mouser.com/ds/2/447/yageodocoutput-1111992.pdf?src-supplier=Mouser, ComponentLink1URL=http://www.mouser.com/ds/2/447/yageodocoutput-1111992.pdf?src-supplier=Mouser, ComponentLink2Description=https://datasheet.octopart.com/AC0805FR-07200KL-Yageo-datasheet-151884373.pdf?src-supplier=Future+Electronics, ComponentLink2URL=https://datasheet.octopart.com/AC0805FR-07200KL-Yageo-datasheet-151884373.pdf?src-supplier=Future+Electronics, ComponentLink3Description=http://www.yageo.com/NewPortal/yageodocoutput?fileName=/pdf/R-Chip/PYu-AC_51_RoHS_L_6.pdf&src-supplier=Digi-Key, ComponentLink3URL=http://www.yageo.com/NewPortal/yageodocoutput?fileName=/pdf/R-Chip/PYu-AC_51_RoHS_L_6.pdf&src-supplier=Digi-Key, ComponentLink4Description=http://www.yageo.com/documents/recent/PYu-AC_51_RoHS_L_2.pdf?src-supplier=Future+Electronics, ComponentLink4URL=http://www.yageo.com/documents/recent/PYu-AC_51_RoHS_L_2.pdf?src-supplier=Future+Electronics, Manufacturer Part Number=AC0805FR-07200KL, Pricing 1="1=0,1, 10=0,029, 50=0,0188, 100=0,0158, 500=0,01096, 1000=0,00948 (USD)", RoHS=Yes, Stock 1=11002, Supplier 1=Digi-Key
R8 R11: library part RP0805FRE0710KL, "Res, 10K, 1%, 0.125W, Thin Film, 0805 Rohs Compliant: Yes", Manufacturer=Yageo, Supplier Part Number 1=13-RP0805FRE0710KLCT-ND, Category="Chip SMD Resistors", Manufacturer Part Number=RP0805FRE0710KL, Pricing 1="1=0,34, 10=0,289, 50=0,1524, 100=0,1129, 500=0,06828, 1000=0,04727 (USD)", RoHS=No, Stock 1=4789, Supplier 1=Digi-Key
R12 R14 R16 R17 R18: library part RES
U1: "Soft Sw PWM Cntrlr 2-OUT Power Supply Controller 200KHz/300KHz/400KHz/500KHz 32-Pin QFN EP", Manufacturer=Renesas, Supplier Part Number 1=ISL6236AIRZ-ND, ComponentLink1Description=https://datasheet.octopart.com/ISL6236AIRZ-Renesas-datasheet-138160199.pdf?src-supplier=Future+Electronics, ComponentLink1URL=https://datasheet.octopart.com/ISL6236AIRZ-Renesas-datasheet-138160199.pdf?src-supplier=Future+Electronics, ComponentLink2Description=http://www.intersil.com/content/dam/Intersil/documents/isl6/isl6236a.pdf?src-supplier=Digi-Key, ComponentLink2URL=http://www.intersil.com/content/dam/Intersil/documents/isl6/isl6236a.pdf?src-supplier=Digi-Key, Manufacturer Part Number=ISL6236AIRZ, Pricing 1="1=6,69, 10=6,039, 25=5,7584, 100=5, 250=4,77528, 500=4,4255 (USD)", RoHS=Yes, Stock 1=663, Supplier 1=Digi-Key

## Via types
v1: diameter 0.6, hole 0.3, L1 to L6, tented both sides, 96 vias

## Nets (pads, with @x,y where several pads share a name; then routed paths per layer and width w, separated by ;. In a path a pad name is that pad's centre, name@x,y a point inside that pad or via, vN(x,y) a via of type N, cw(c..) or ccw(c..) an arc to the next point about the centre after c; other vN are vias at no path point)
+1V5: C9.1 J3.1 L1.1 R12.2 U1.10 | length 16.8
  L3 w1: v1(31,19.6) 31,16.4 35.6,11.8 v1(36.8,11.8)
  L6 w0.2: U1.10 26.665,22.485 26.665,21.996 27.219,21.442
  L6 w0.5: 27.3,21.5 28.225,20.575 28.45,20.575 29.375,19.65 29.675,19.65 29.806,19.519 29.868,19.581 30.981,19.581 v1(31,19.6)
+1V05: C10.1 J4.1 L2.2 U1.30 | length 16.3
  L3 w1: v1(26.231,28.234) 26.231,31.931 33.2,38.9 v1(35,38.9)
  L6 w0.2: U1.30 26.15,28.045 26.231,28.126 v1(26.231,28.234)
+5V_LDO: C1.2 R1.2 U1.7 | length 27.5
  L3 w0.8: v1(12.6,24.4) 14,25.8 17.873,25.8 19.473,24.2 22.5,24.2 23.788,22.912 29.512,22.912 v1(31,23.4)
  L6 w0.2: U1.7 28.335,23.65 28.712,23.273
  L6 w0.5: v1(12.6,24.4) R1.2 ; 28.712,23.273 28.712,22.388 29.2,21.9 29.95,21.9 C1.2 ; C1.2@31,21.95 v1(31,23.4)
+5V_PVCC: C3.2 R1.1 R2.2 R3.1 U1.19 | length 13.2
  L6 w0.2: 22.216,24.135 22.985,24.135 U1.19
  L6 w0.5: R1.1 15.95,25.8 ; R2.2 R3.1 15.95,25.8 ; 22.216,24.135 21.504,24.135 21.239,24.4 C3.2 20.25,24.6 19.05,25.8 15.95,25.8
+5V_VCC: C4.2 R3.2 R8.2 R9.2 R10.2 R11.2 R13.2 R16.2 U1.2 U1.3 U1.20 | length 18.8
  L6 w0.2: v1(21.6,25.1) 21.677,25.023 22.106,25.023 22.479,24.65 U1.20 ; R16.2 R16.2@27.35,35.7 ; R13.2@27.3,17.6 R13.2 ; v1@29.75,32.7 v1@29.85,32.6
  L6 w0.5: v1(12.5,27.5) 12.527,27.5 12.95,27.077 13.95,27.077 14.05,27.177 14.05,27.35 R3.2 ; v1(12.6,32.35) R10.2 ; v1(12.6,35) R9.2 ; R11.2 22.581,17.569 22.581,16.719 v1(22.6,16.7) ; v1(27.3,16.6) 27.319,16.619 27.319,17.581 R13.2@27.3,17.6 ; R16.2@27.35,35.7 v1(28.5,35.7) ; 27.8,26 27.8,25.8 28.001,25.8 29.1,26.899 29.1,28.9 30.2,30 C4.2 ; v1(29.7,32.7) R8.2@30.75,32.7 ; C4.2@31,30.05 30.981,30.069 30.981,31.281 v1(31,31.3)
+REF: C12.1 R14.2 U1.1 | length 11.6
  L6 w0.2: U1.1 27.8,27.399 28.2,28.221
  L6 w0.5: 28.2,28.221 28.2,31.3 28.054,31.446 27.25,32.25 27.25,33.5 27.35,33.6 29.273,33.6 29.479,33.6 29.644,33.765 C12.1
+VIN: C2.2 C5.2 C6.2 J1.1 Q1.8 Q2.8 R2.1 U1.6 | length 6.6
  L6 w0.2: U1.6 28.55,24.15 28.7,24 29,24
  L6 w0.5: v1(12.6,29.7) R2.1 ; 29,24 29.7,24 30.3,24.6 30.6,24.6 C2.2@30.9,24.9 ; C2.2@30.95,24.867 31.881,25.798 31.881,26.081 v1(31.9,26.1)
+VREF3: C11.2 R15.2 U1.5 | length 25.6
  L6 w0.2: U1.5 29.1,24.65 29.3,24.85 29.3,24.817
  L6 w0.5: 29.3,24.85 30.056,25.509 30.314,25.767 30.331,25.767 30.772,26.18 30.917,26.325 30.924,26.523 C11.2
  L6 w0.7: R15.2 33.3,38.2 35.15,36.35 35.15,29.35 34.441,28.641 32.057,28.641 31.05,27.633 31.05,27.433 C11.2
EN1: R11.1 U1.14 | length 4.3
  L6 w0.2: R11.1 23.35,19.55 24.65,20.85 U1.14
EN_LDO: R8.1 U1.4 | length 10.7
  L6 w0.2: U1.4 28.612,25.15 29.9,26.438 29.9,28.2 30.498,28.798 31.272,28.798 31.962,29.488 31.962,32.262 32.217,32.517 32.667,32.517 R8.1
FB1: R12.1 R13.1 R17.2 U1.11 | length 9.2
  L6 w0.2: U1.11 26.15,21.85 26.591,21.409 26.591,21.291
  L6 w0.5: 26.591,21.291 26.6,21.283 26.6,20.9 27.143,20.357 27.143,19.65 27.243,19.55 R13.1 ; R13.1@27.364,19.55 27.464,19.45 27.75,19.45 29.375,17.825 29.375,17.75 29.475,17.65 R17.2
GND: C1.1 C2.1 C3.1 C4.1 C5.1 C6.1 C9.2 C10.2 C11.1 C12.2 J2.1 J5.1 J6.1 Q1.2 Q1.3 Q2.2 Q2.3 R6.2 R7.1 R17.1 R18.1 U1.8 U1.21 U1.22 U1.29 U1.33 | length 12.8
  L1 w0.2: C9.2 C9.2@38.1,19.8
  L6 w0.2: U1.22@22.985,25.635 U1.22 24.203,25.65 v1(24.365,25.812) ; U1.21 25.15,25.15 U1.33 v1(25.4,25.1) ; R7.1@24.9,17.625 R7.1 ; v1(25.2,28.7) 25.2,28.592 25.5,28.292 25.5,28.05 25.65,27.9 U1.29 ; U1.8 27.8,23.135 27.8,22.308 28.1,22.008 v1(28.1,21.9)
  L6 w0.5: v1(24.65,31.45) R6.2 ; v1(24.9,16.5) R7.1@24.9,17.625 ; R18.1 v1(27.25,42.05) ; R17.1 v1(33.65,19.55)
  other v1: 8.1,11.9 9.3,11.9 10.5,11.9 8.1,13.1 9.3,13.1 10.5,13.1 8.1,14.2 9.3,14.2 10.5,14.2 8.1,15.4 9.3,15.4 10.5,15.4 37.4,17.5 38.6,17.5 36.4,18.6 39.6,18.6 10.9,19.1 10.9,19.9 10.9,20.8 36.4,20.8 39.6,20.8 35,21.5 35,22.3 24.265,23.812 26.465,23.812 17.5,24 33.8,24.267 17.5,24.8 33.8,25.067 26.365,25.812 33.8,26.933 33.8,27.733 37.4,28.1 38.6,28.1 36.4,29.2 39.6,29.2 33.8,29.6 33.8,30.4 36.4,31.4 39.6,31.4 33.7,34.7 8,35 9.3,35 10.5,35 33.7,35.5 8,36.5 9.3,36.5 10.5,36.5 8,38 9.2,38 10.5,38 8,39.5 9.2,39.5 10.5,39.5 16.7,43.8 16.7,44.6 16.7,45.4
LGATE1: Q1.4 U1.18 | length 39.5
  L1 w0.5: Q1.4 12.178,13.097 14.198,13.097 v1(14.2,13.1)
  L3 w1: v1(14.2,13.1) 14.236,13.064 14.236,12.136 11.8,9.7 7.2,9.7 5.8,11.1 5.8,15.9 8.5,18.6 8.5,20.8 9.9,22.2 21.1,22.2 v1(21.9,23)
  L6 w0.2: v1(21.9,23) 22.535,23.635 22.985,23.635 U1.18
LGATE2: Q2.4 U1.23 | length 18.5
  L1 w0.5: Q2.4@12.33,37.1 12.333,37.098 14.198,37.098 v1(14.2,37.1)
  L3 w1: v1(14.2,37.1) 14.2,31.5 19.4,26.3 v1(21.5,26.3)
  L6 w0.2: v1(21.5,26.3) 21.608,26.3 21.758,26.15 U1.23
NetC7_2: C7.2 R4.1 | length 2.7
  L6 w0.2: C7.2 18.15,20.4 18.35,20.6 R4.1
NetC8_1: C8.1 R5.2 | length 2.6
  L6 w0.2: C8.1 18.35,28.35 18.45,28.25 R5.2
NetR4_2: R4.2 U1.17 | length 3.5
  L6 w0.2: R4.2 22,21.8 23,22.8 U1.17
NetR5_1: R5.1 U1.24 | length 3.2
  L6 w0.2: R5.1 20.35,27.15 20.6,27.4 21.649,27.4 22.399,26.65 U1.24
NetR6_1: R6.1 U1.31 | length 2.6
  L6 w0.2: R6.1 26.116,29.55 26.366,29.3 26.366,29.017 26.831,28.552 26.831,27.986 26.65,27.805 U1.31
NetR7_2: R7.2 U1.12 | length 3.5
  L6 w0.2: R7.2 25.033,19.55 25.283,19.8 25.283,20.083 25.9,20.7 25.9,21.501 25.65,21.751 U1.12
PHASE1: C7.1 L1.2 Q1.5 Q1.6 Q1.7 U1.16 | length 16.6
  L1 w0.5: Q1.5 18.5,13.095 21.22,13.095 L1.2
  L3 w1: v1(18.8,13.1) 20.5,14.8 v1(20.5,17.3)
  L6 w0.2: U1.16@23.585,22.235 23.635,22.285 U1.16@23.635,22.485
  L6 w0.5: v1(20.5,17.3) 20.5,17.327 20.05,17.777 20.05,20.15 20.6,20.7 22.05,20.7 U1.16@23.585,22.235
PHASE2: C8.2 L2.1 Q2.5 Q2.6 Q2.7 U1.25 | length 17.8
  L1 w0.2: Q2.5 Q2.5@17.33,37.1 ; L2.1@19.22,37.095 L2.1
  L1 w0.5: Q2.5@17.33,37.1 v1(18.7,37.1) 18.705,37.095 L2.1@19.22,37.095
  L3 w1: v1(18.7,37.1) 20.5,35.3 20.5,32.2 v1(19.6,31.3)
  L6 w0.2: 23,27.3 U1.25
  L6 w0.5: v1(19.6,31.3) 20.25,30.65 20.25,29.445 20.45,29.245 21.055,29.245 23,27.3
POK1: R10.1 U1.13 U1.27 | length 41.1
  L3 w0.2: v1(17.2,32.3) 17.2,32.283 16.9,31.983 16.9,30.5 19.3,28.1 21.003,28.1 23.3,25.803 23.3,25.8 24.6,24.5 31.6,24.5 32.1,24 32.1,22.5 30.8,21.2 v1(25.3,21.2)
  L6 w0.2: R10.1 16,32.3 v1(17.2,32.3) 17.25,32.35 20.036,32.35 24.635,27.751 24.635,27.315 U1.27 ; U1.13 25.15,21.458 25.3,21.308 v1(25.3,21.2)
POK2: R9.1 U1.28 | length 12.7
  L6 w0.2: R9.1 17.951,35 25.135,27.816 25.135,27.315 U1.28
REFIN2: R14.1 R15.1 R16.1 R18.2 U1.32 | length 17.4
  L6 w0.2: U1.32 U1.32@27.15,27.42
  L6 w0.5: R18.2@25.35,40.006 R15.1 R16.1 R14.1 24.25,33.4 23.4,32.55 23.4,31.2 24.087,30.513 26.774,30.513 27.254,30.033 27.4,29.886 27.4,29.472 27.381,27.795 27.346,27.723 27.25,27.627 U1.32@27.215,27.42
UGATE1: Q1.1 U1.15 | length 15.4
  L1 w0.5: Q1.1 12.225,16.855 13.618,16.855 13.873,16.6 v1(13.9,16.6)
  L3 w1: v1(13.9,16.6) 14.3,16.2 15.6,16.2 19.4,20 22.6,20 v1(23.8,21.2)
  L6 w0.2: v1(23.8,21.2) 23.8,21.308 24.15,21.658 U1.15
UGATE2: Q2.1 U1.26 | length 21.1
  L1 w0.5: Q2.1 12.278,40.902 13.861,40.902 14.181,40.583 14.181,40.519 v1(14.2,40.5)
  L3 w1: v1(14.2,40.5) 14.2,39.3 18.2,35.3 18.2,30.8 19.167,29.833 21.567,29.833 v1(22.9,28.5)
  L6 w0.2: v1(22.9,28.5) 22.977,28.423 23.366,28.423 24.135,27.654 24.135,27.315 U1.26
pads on no net: U1.9

## Polygon pours and split planes (outlines as drawn)
GND on L1 "GND_L01_P008" (solid, pour order 8): 10.4,21.3 13.5,21.3 13.5,18.2 10.4,18.2
+1V05 on L1 "+1V05_L01_P003" (solid, pour order 3): 29,41.8 33,41.8 36.6,38.2 47.1,38.2 47.1,33.7 36.6,33.7 34.2,36.1 29,36.1
+VIN on L1 "+VIN_L01_P004" (solid, pour order 4): 14.3,17.372 15.04,16.517 18.4,16.517 18.4,18.4 16.8,18.4 16.8,27 28.535,27 31.008,24.877 31.84,25.06 32.59,25.81 32.639,26.81 27.949,30.8 7.8,30.8 6.5,32.1 6.5,41.548 7.8,42.467 13.067,42.467 15.5,40.5 18.5,40.5 18.5,41.7 15.5,41.7 13.6,43.6 13.6,45.599 12.5,46 6,46 5.6,46 2.6,43 2.6,28.584 4.282,26.7 14.3,26.7
PHASE1 on L1 "PHASE1_L01_P001" (solid, pour order 1): 16,16.1 23.2,16.1 23.2,10.3 18.4,10.3 16,12.7
GND on L1 "GND_L01_P018" (solid, pour order 18): 7.5,16 13.3,16 13.3,14 10.8,14 10.8,10.9 7.5,10.9
GND on L1 "GND_L01_P017" (solid, pour order 17): 13.4,40 7.5,40 7.5,34.5 10.9,34.5 10.9,38 13.4,38
GND on L1 "GND_L01_P010" (solid, pour order 10): 36.1,21.6 39.9,21.6 39.9,17.2 36.1,17.2
GND on L1 "GND_L01_P009" (solid, pour order 9): 36.1,32.2 39.9,32.2 39.9,27.8 36.1,27.8
GND on L1 "GND_L01_P005" (solid, pour order 5): 14.9,45.8 14.9,42.9 17.1,42.9 17.1,45.8
+1V5 on L1 "+1V5_L01_P002" (solid, pour order 2): 29.2,16.3 47.1,16.3 47.1,11.4 46.9,11.2 34.1,11.2 33.1,10.2 29.2,10.2
PHASE2 on L1 "PHASE2_L01_P000" (solid, pour order 0): 19.1,41.7 23,41.7 23,36.1 17,36.1 16.2,36.9 16.2,40 19.1,40
GND on L6 "GND_L06_P016" (solid, pour order 16): 17.2,25.2 18.8,25.2 18.8,23.6 17.2,23.6
GND on L6 "GND_L06_P015" (solid, pour order 15): 33.6,22.7 35.3,22.7 35.3,21.1 33.6,21.1
GND on L6 "GND_L06_P014" (solid, pour order 14): 32.4,25.367 34.1,25.367 34.1,23.967 32.4,23.967
GND on L6 "GND_L06_P013" (solid, pour order 13): 32.4,28.033 34.1,28.033 34.1,26.633 32.4,26.633
GND on L6 "GND_L06_P012" (solid, pour order 12): 32.4,30.7 34.1,30.7 34.1,29.3 32.4,29.3
GND on L6 "GND_L06_P011" (solid, pour order 11): 32.3,35.8 34,35.8 34,34.4 32.3,34.4
+5V_VCC on L4 "+5V_VCC_L04_P019" (solid, pour order 19): 7.5,42.5 42.5,42.5 42.5,10 7.5,10
GND on L5 (split plane): 49.49,0.51 0.51,0.51 0.51,49.49 49.49,49.49
GND on L2 (split plane): 49.49,0.51 0.51,0.51 0.51,49.49 49.49,49.49

## Other copper
L1:
  text "EA2EZG" at 37.1,4.5 h2
  text "SMPS ISL6236" at 4.8,1.9 h2.5
  text "2023" at 42.9,1.9 h1.5

## Silkscreen, mask and mechanical layers (free items; w line width, h text height)
Top Overlay:
  text "+OUT2" at 42.39,38.796 h2
  text "+VIN" at 2.4,32.6 h2
  text "GND" at 43.1,25.926 h2
  text "GND" at 3.1,22.726 h2
  text "GND" at 43.1,22.726 h2
  text "+OUT1" at 42.39,9.996 h2
Bottom Overlay:
  text "1" at 28.8,26.7 h0.8
  text "V1.1" at 28,1.9 h2.5
Top Solder:
  text "EA2EZG" at 37.1,4.5 h2
  text "SMPS ISL6236" at 4.8,1.9 h2.5
  text "2023" at 42.9,1.9 h1.5
Board Outline:
  the board outline again, w0.7

## Text inside footprints (layer, text, board x,y; h text height)
C9: Top Overlay "+" at 35.613,9.9 h2 r90
C10: Top Overlay "+" at 33.787,40.1 h2 r270
Q1: Top Overlay "1" at 9.7,17.1 h0.9 r270
Q2: Top Overlay "1" at 9.6,41 h0.9 r270